# Altium PCB E73_2G4M08S1C.pcbdoc
Units mm, origin at the board's own origin, x right, y up, seen from the top; angles counter-clockwise.
Board outline 42.05 x 44.78 mm, 2 copper layers (Top Layer, Bottom Layer); 1 components, 0 nets, 43 pads, 0 vias.
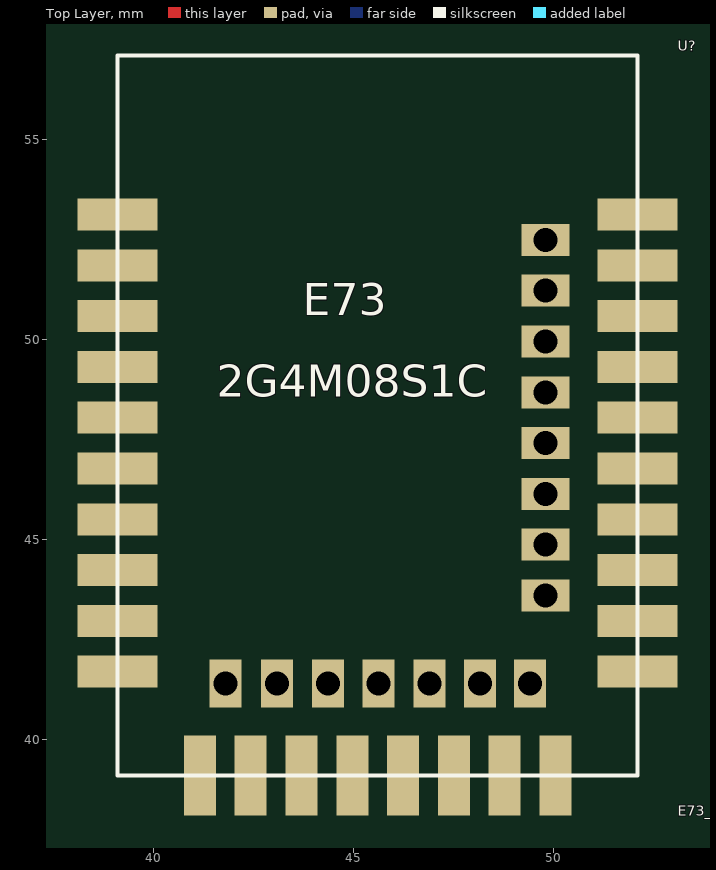
[diagram p0: Top Layer view]
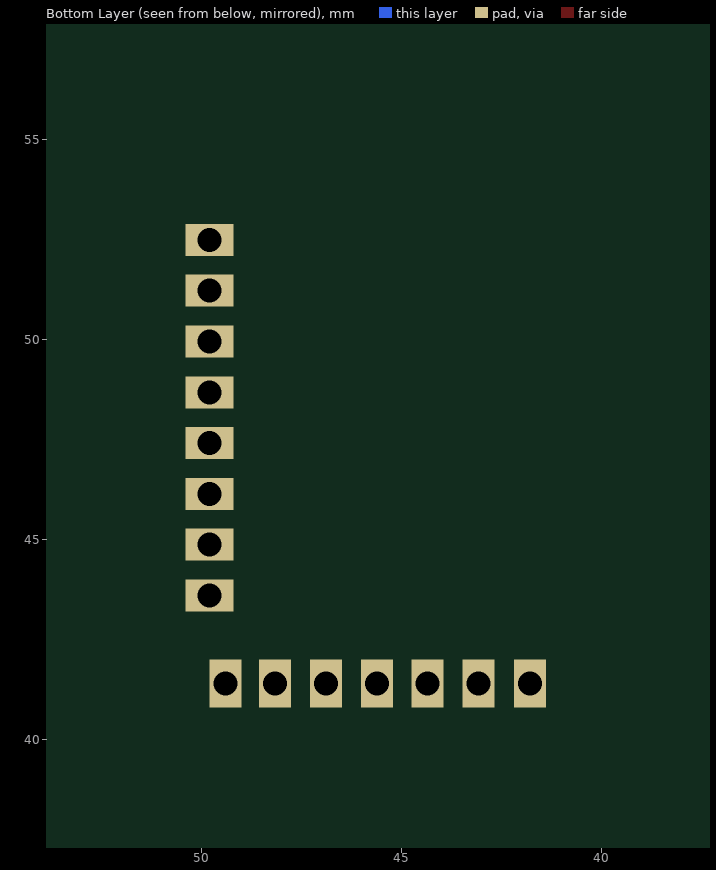
[diagram p1: Bottom Layer view, seen from below]

## Layer stack, top to bottom
Top Layer: signal copper (thickness not stored)
Dielectric: dielectric 0.32, FR-4, Dk 4.8
Bottom Layer: signal copper (thickness not stored)

## Board outline
67.451,25.4 25.4,25.4 25.4,70.181 67.451,70.181

## Components (designator, comment, footprint, x,y, rotation, side; value= is the part's Value field where it differs from the comment)
U? "E73_2G4M08S1C" E73_2G4M08S1C 45.6,47.663 r0 top

## Footprints (in the part's own frame and the unit in brackets; to place one, negate y for a bottom-side part, rotate by r counter-clockwise, add the part's x,y. Pads: shape width x height; smd on the part's side, far side on the other; paste and mask are expansions set on the pad)
E73_2G4M08S1C [mm]
  rect 2x0.8 smd: 1(-6.5,5.466) 2(-6.5,4.196) 3(-6.5,2.926) 4(-6.5,1.656) 5(-6.5,0.386) 6(-6.5,-0.884) 7(-6.5,-2.154) 8(-6.5,-3.423) 9(-6.5,-4.693) 10(-6.5,-5.964) 26(6.5,-5.964) 27(6.5,-4.693) 29(6.5,-3.423) 31(6.5,-2.154) 33(6.5,-0.884) 35(6.5,0.386) 37(6.5,1.656) 39(6.5,2.926) 41(6.5,4.196) 43(6.5,5.466)
  rect 0.8x2 smd: 11(-4.445,-8.563) 13(-3.175,-8.563) 15(-1.905,-8.563) 17(-0.635,-8.563) 19(0.635,-8.563) 21(1.905,-8.563) 23(3.175,-8.563) 25(4.445,-8.563)
  rect 0.8x1.2 hole 0.6: 12(-3.81,-6.264) 14(-2.517,-6.264) 16(-1.247,-6.264) 18(0.023,-6.264) 20(1.293,-6.264) 22(2.563,-6.264) 24(3.81,-6.264)
  rect 1.2x0.8 hole 0.6: 28(4.2,-4.059) 30(4.2,-2.788) 32(4.2,-1.518) 34(4.2,-0.249) 36(4.2,1.021) 38(4.2,2.291) 40(4.2,3.561) 42(4.2,4.831)
  silkscreen extent -6.5,-8.56 6.5,9.44

## Nets (pads, with @x,y where several pads share a name; then routed paths per layer and width w, separated by ;. In a path a pad name is that pad's centre, name@x,y a point inside that pad or via, vN(x,y) a via of type N, cw(c..) or ccw(c..) an arc to the next point about the centre after c; other vN are vias at no path point)
pads on no net: U?.1 U?.2 U?.3 U?.4 U?.5 U?.6 U?.7 U?.8 U?.9 U?.10 U?.11 U?.12 U?.13 U?.14 U?.15 U?.16 U?.17 U?.18 U?.19 U?.20 U?.21 U?.22 U?.23 U?.24 U?.25 U?.26 U?.27 U?.28 U?.29 U?.30 U?.31 U?.32 U?.33 U?.34 U?.35 U?.36 U?.37 U?.38 U?.39 U?.40 U?.41 U?.42 U?.43

## Text inside footprints (layer, text, board x,y; h text height)
U?: Top Overlay "E73" at 43.732,50.606 h0.8; Top Overlay "2G4M08S1C" at 41.573,48.574 h0.8